# Altium PCB MACH_PCB.PcbDoc
Units mm, origin at the board's own origin, x right, y up, seen from the top; angles counter-clockwise.
Board outline 64 x 57 mm, 2 copper layers (Top Layer, Bottom Layer); 85 components, 38 nets, 264 pads, 24 vias.
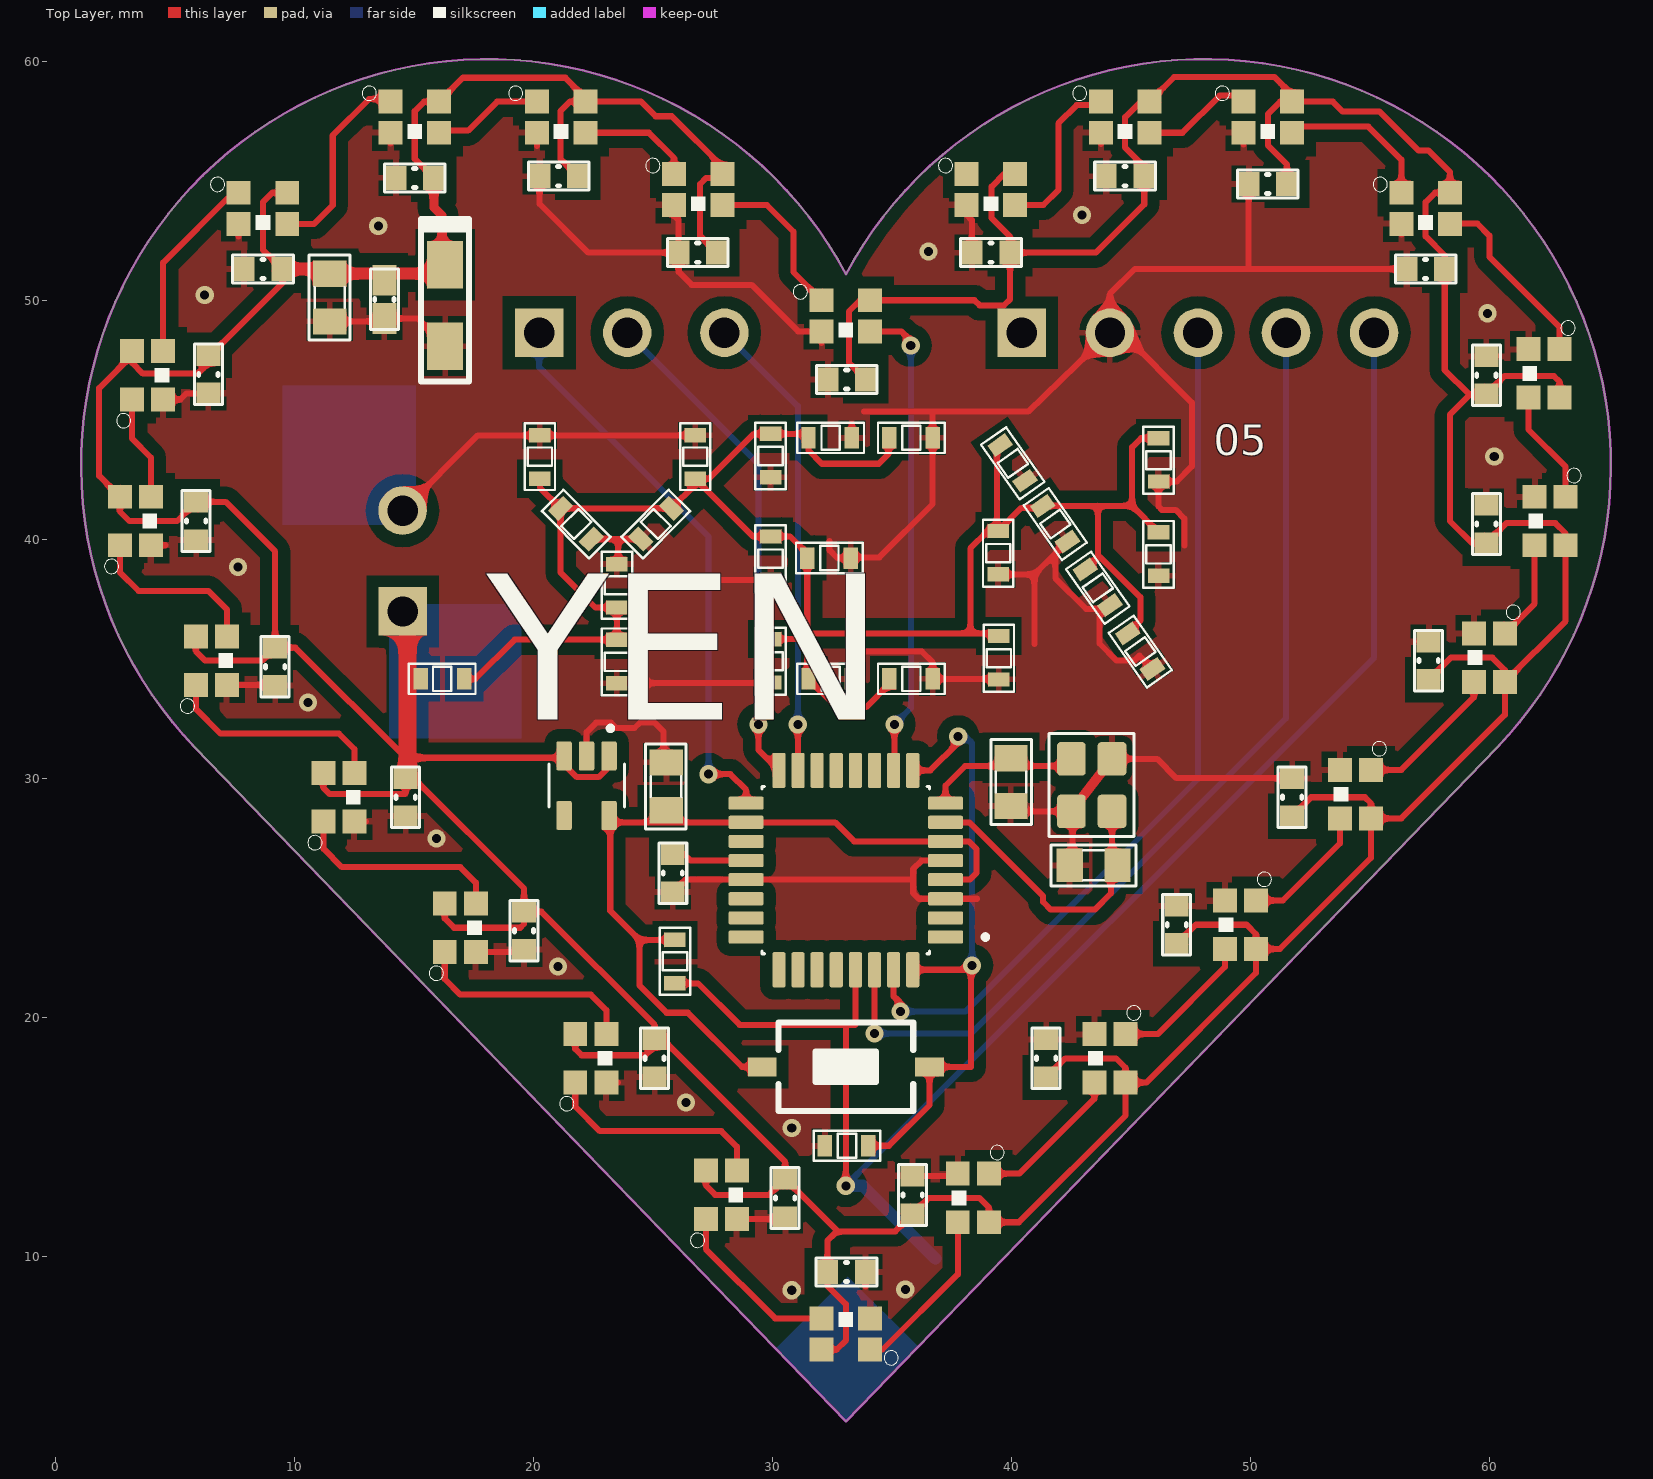
[diagram p0: Top Layer view]
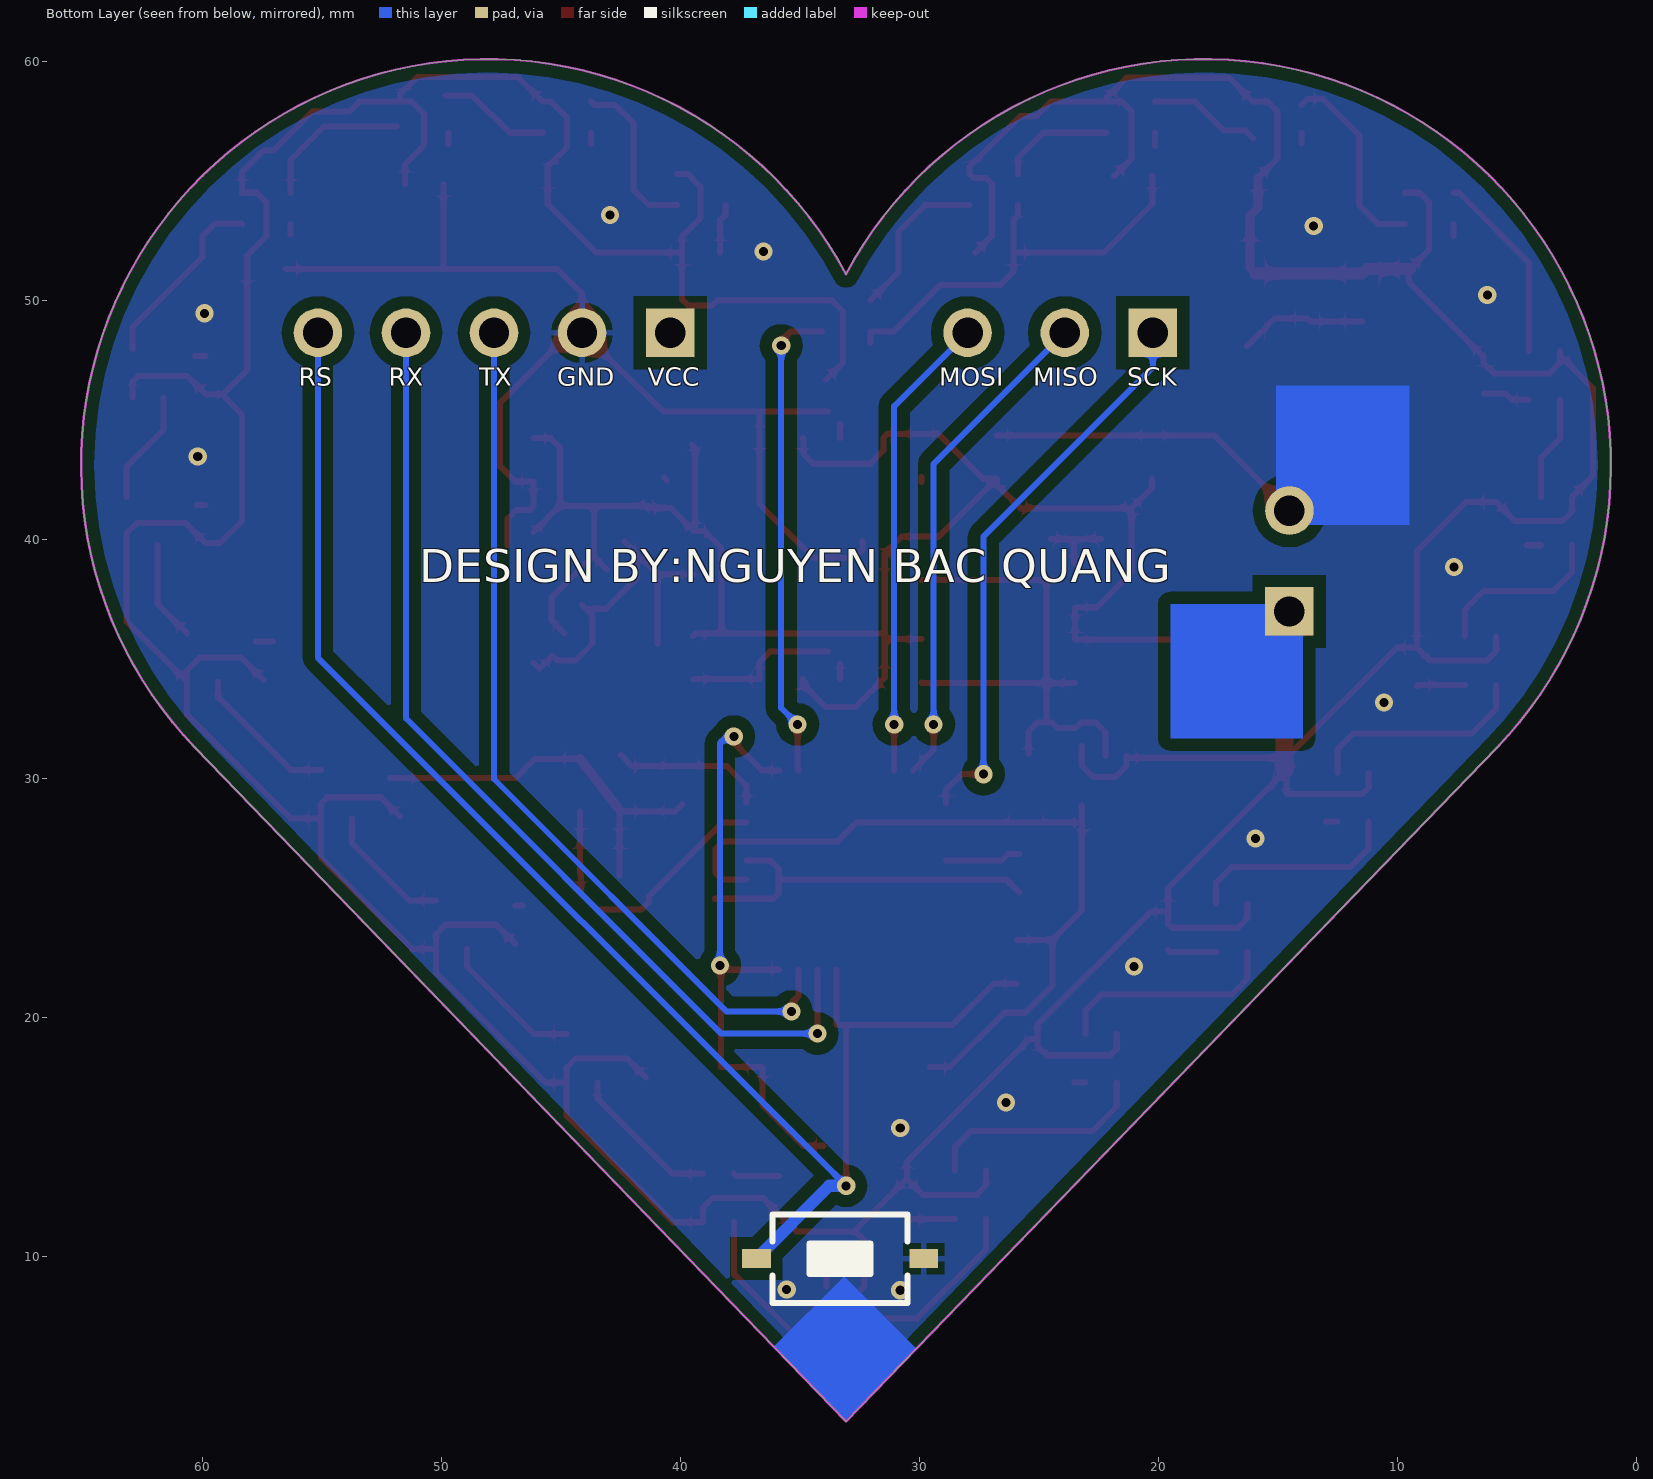
[diagram p1: Bottom Layer view, seen from below]
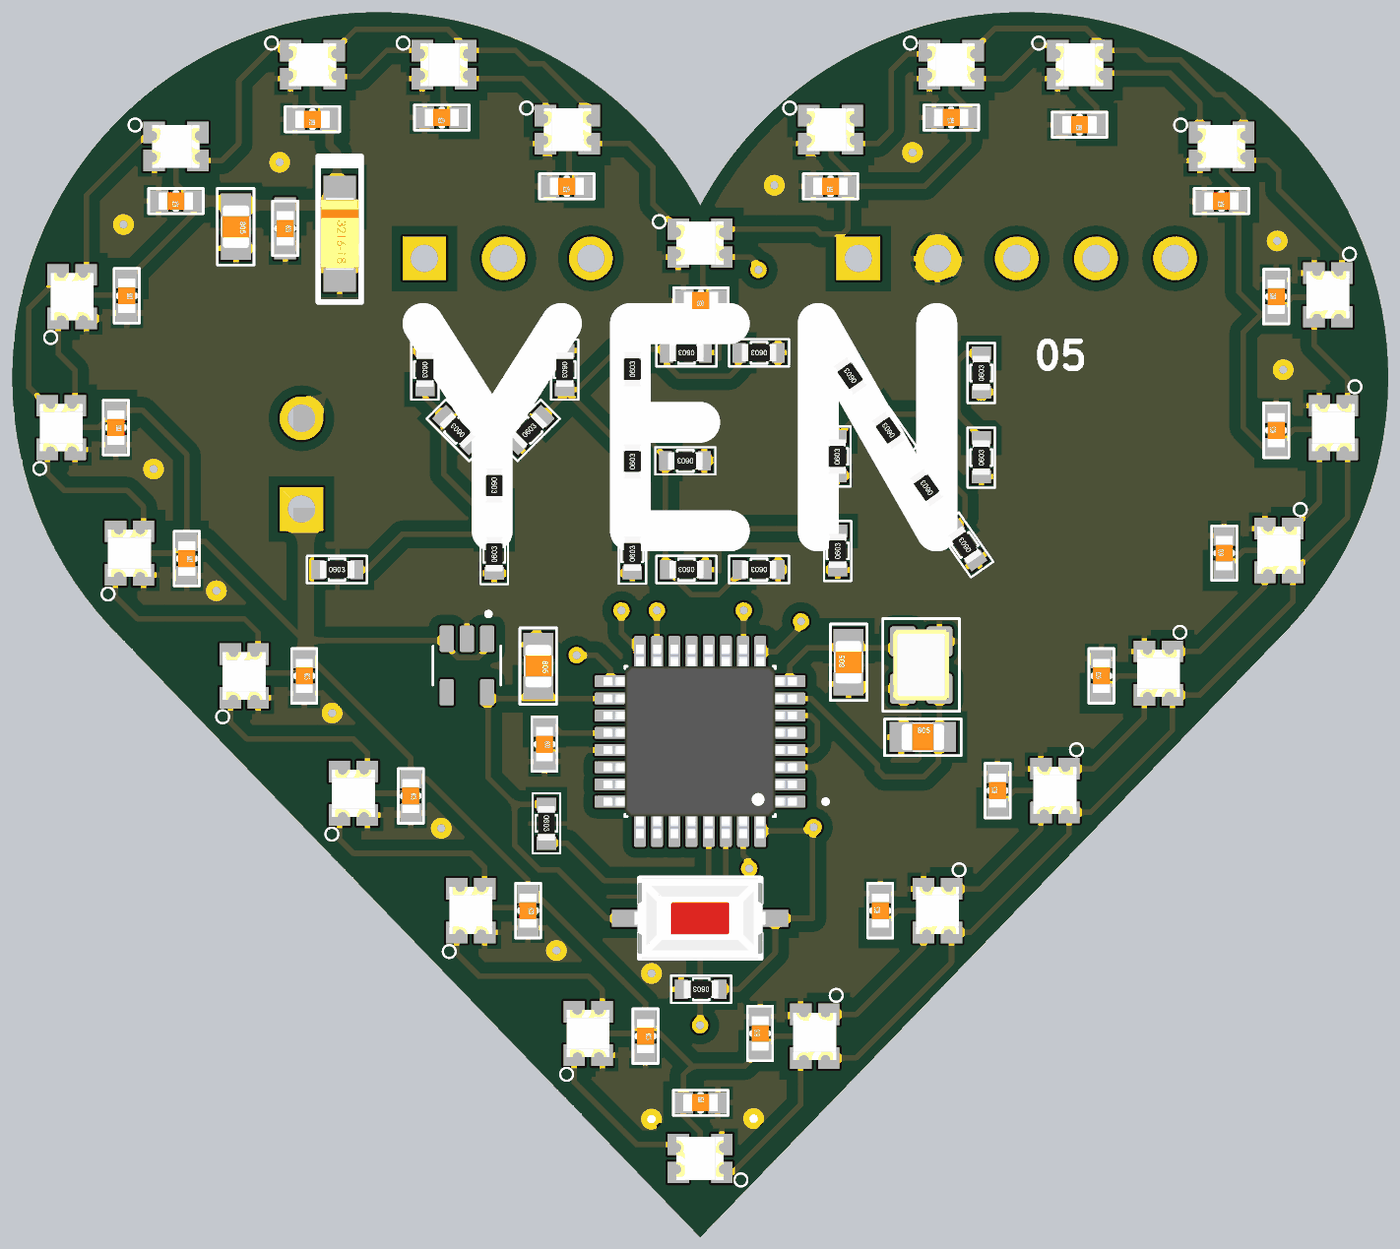
[diagram p2: 3D render of the assembled board from above, using the file's embedded part models]

## Layer stack, top to bottom
Top Solder: solder mask 0.0102, Solder Resist, Dk 3.5
Top Layer: signal copper 0.0356
Dielectric 1: dielectric 0.32, FR-4, Dk 4.8
Bottom Layer: signal copper 0.0356
Bottom Solder: solder mask 0.0102, Solder Resist, Dk 3.5

## Board outline
5.851,31.282 33.078,3.092 60.306,31.282 ccw(c48.078,43.092) 33.078,51.092 ccw(c18.078,43.092)

## Design rules (kind name [scope] priority, off if disabled: settings)
Clearance [All] p1: gap=0.508
PolygonConnect [All] p1: connectstyle=Relief reliefconductorwidth=0.254 reliefentries=4 polygonreliefangle="90 Angle" airgapwidth=0.254
RoutingVias [All] p1: holewidth=0.381 width=0.762 viastyle="Through Hole" minholewidth=0.381 minwidth=0.762 maxholewidth=0.381 maxwidth=0.762
SolderMaskExpansion [All] p1: expansion=0.102
Width [All] p1: maxlimit=0.254 minlimit=0.254 preferedwidth=0.254
30 further rules are at their usual default settings.

## Classes and differential pairs
component class "MACH NGUYEN LY": Cp1

## Components (designator, comment, footprint, x,y, rotation, side; value= is the part's Value field where it differs from the comment)
C1 "22pF" CN-SMD-0805 43.434,26.365 r0 top
C2 "22pF" CN-SMD-0805 39.98,29.845 r90 top
C3 "0.1uF" CN-SMD-0603#1 25.832,26.035 r270 top locked
C4 "1uF" CN-SMD-0805 25.552,29.667 r270 top
C5 "1uF" CN-SMD-0805 11.481,50.114 r270 top
C6 "0.1uF" CN-SMD-0603#2 13.767,50.038 r270 top locked
C7 "0.1uF" CN-SMD-0603#1 33.109,46.685 r180 top locked
C8 "0.1uF" CN-SMD-0603#1 26.873,51.994 r180 top locked
C9 "0.1uF" CN-SMD-0603#1 21.057,55.194 r180 top locked
C10 "0.1uF" CN-SMD-0603#1 15.037,55.118 r180 top locked
C11 "0.1uF" CN-SMD-0603#1 8.687,51.308 r180 top locked
C12 "0.1uF" CN-SMD-0603#1 6.401,46.901 r270 top locked
C13 "0.1uF" CN-SMD-0603#1 5.893,40.767 r270 top locked
C14 "0.1uF" CN-SMD-0603#1 9.195,34.671 r270 top locked
C15 "0.1uF" CN-SMD-0603#1 14.656,29.21 r270 top locked
C16 "0.1uF" CN-SMD-0603#1 19.609,23.622 r270 top locked
C17 "0.1uF" CN-SMD-0603#1 25.07,18.288 r270 top locked
C18 "0.1uF" CN-SMD-0603#1 30.531,12.446 r270 top locked
C19 "0.1uF" CN-SMD-0603#1 33.096,9.347 r0 top locked
C20 "0.1uF" CN-SMD-0603#1 35.865,12.573 r90 top locked
C21 "0.1uF" CN-SMD-0603#1 41.453,18.288 r90 top locked
C22 "0.1uF" CN-SMD-0603#1 46.914,23.876 r90 top locked
C23 "0.1uF" CN-SMD-0603#1 51.74,29.21 r90 top locked
C24 "0.1uF" CN-SMD-0603#1 57.455,34.925 r90 top locked
C25 "0.1uF" CN-SMD-0603#1 59.868,40.64 r90 top locked
C26 "0.1uF" CN-SMD-0603#1 59.868,46.863 r90 top locked
C27 "0.1uF" CN-SMD-0603#1 57.328,51.308 r180 top locked
C28 "0.1uF" CN-SMD-0603#1 50.724,54.864 r180 top locked
C29 "0.1uF" CN-SMD-0603#1 44.755,55.194 r180 top locked
C30 "0.1uF" CN-SMD-0603#1 39.141,51.994 r180 top locked
Cp1 "4.7uF" "tu tantalum smd3216" 16.307,49.784 r270 top locked
D1 "" RES-SMD-0603 20.269,43.459 r270 top
D2 "" RES-SMD-0603 21.793,40.64 r135 top
D3 "" RES-SMD-0603 26.772,43.459 r270 top
D4 "" RES-SMD-0603 25.121,40.64 r45 top
D5 "" RES-SMD-0603 23.495,38.075 r270 top
D6 "" RES-SMD-0603 23.495,34.874 r90 top
D7 "" RES-SMD-0603 29.921,43.485 r90 top
D8 "" RES-SMD-0603 29.921,39.192 r90 top
D9 "" RES-SMD-0603 29.921,34.9 r90 top
D10 "" RES-SMD-0603 32.436,44.247 r180 top
D11 "" RES-SMD-0603 35.814,44.247 r180 top
D12 "" RES-SMD-0603 32.385,39.218 r180 top
D13 "" RES-SMD-0603 32.436,34.163 r180 top
D14 "" RES-SMD-0603 35.814,34.163 r180 top
D15 "" RES-SMD-0603 39.472,35.027 r90 top
D16 "" RES-SMD-0603 39.446,39.421 r90 top
D17 "" RES-SMD-0603 40.056,43.18 r125 top
D18 "" RES-SMD-0603 41.834,40.64 r125 top
D19 "" RES-SMD-0603 43.612,37.973 r125 top
D20 "" RES-SMD-0603 45.39,35.306 r125 top
D21 "" RES-SMD-0603 46.152,39.37 r90 top
D22 "" RES-SMD-0603 46.152,43.307 r90 top
IC "ATMEGA328P-AU" QFP80P900X900X120-32N 33.071,26.162 r180 top locked
Led1 "" WS2812B-2020 33.071,49.352 r180 top locked
Led2 "" WS2812B-2020 26.899,54.635 r180 top locked
Led3 "" WS2812B-2020 21.158,57.658 r180 top locked
Led4 "" WS2812B-2020 15.037,57.658 r180 top locked
Led5 "" WS2812B-2020 8.687,53.848 r180 top locked
Led6 "" WS2812B-2020 3.861,46.863 r270 top locked
Led7 "" WS2812B-2020 3.353,40.767 r270 top locked
Led8 "" WS2812B-2020 6.528,34.925 r270 top locked
Led9 "" WS2812B-2020 11.862,29.21 r270 top locked
Led10 "" WS2812B-2020 16.942,23.749 r270 top locked
Led11 "" WS2812B-2020 22.403,18.288 r270 top locked
Led12 "" WS2812B-2020 27.864,12.573 r270 top locked
Led13 "" WS2812B-2020 33.071,6.756 r0 top locked
Led14 "" WS2812B-2020 38.405,12.446 r90 top locked
Led15 "" WS2812B-2020 44.12,18.288 r90 top locked
Led16 "" WS2812B-2020 49.581,23.876 r90 top locked
Led17 "" WS2812B-2020 54.392,29.338 r90 top locked
Led18 "" WS2812B-2020 59.995,35.052 r90 top locked
Led19 "" WS2812B-2020 62.535,40.767 r90 top locked
Led20 "" WS2812B-2020 62.281,46.94 r90 top locked
Led21 "" WS2812B-2020 57.328,53.848 r180 top locked
Led22 "" WS2812B-2020 50.724,57.658 r180 top locked
Led23 "" WS2812B-2020 44.755,57.658 r180 top locked
Led24 "" WS2812B-2020 39.141,54.635 r180 top locked
R1 "10k" RES-SMD-0603 25.922,22.352 r270 top locked
R2 "10k" RES-SMD-0603 33.122,14.63 r180 top locked
R3 "" RES-SMD-0603 16.18,34.163 r0 top
SW1 "" SW1-SMD 33.325,9.906 r0 bottom
SW2 "" SW1-SMD 33.071,17.932 r180 top locked
U1 "RT9013-33GB" SOT94P279X129-5N 22.225,29.693 r270 top locked
XT1 "16Mhz" "Thach Anh 4 chan 1" 43.358,29.718 r270 top locked

## Footprints (in the part's own frame and the unit in brackets; to place one, negate y for a bottom-side part, rotate by r counter-clockwise, add the part's x,y. Pads: shape width x height; smd on the part's side, far side on the other; paste and mask are expansions set on the pad)
CN-SMD-0603#1 [mm]
  rect 0.9x1 smd: 1(-0.8,0) 2(0.8,0)
  silkscreen extent -1.27,-0.58 1.27,0.58, body extent -0.8,-0.4 0.8,0.4, height 0.3
CN-SMD-0603#2 [mm]
  rect 1.281x1 smd: 1(-0.8,0) 2(0.8,0)
  silkscreen extent -1.27,-0.58 1.27,0.58, body extent -0.8,-0.4 0.8,0.4, height 0.3
CN-SMD-0805 [mm]
  rect 1.1x1.397 smd: 1(-1,0) 2(1,0)
  silkscreen extent -1.78,-0.86 1.78,0.84, body extent -1,-0.62 1,0.63, height 0.8
QFP80P900X900X120-32N [mm]
  rrect25% 1.47x0.55 smd: 1(-4.17,2.8) 2(-4.17,2) 3(-4.17,1.2) 4(-4.17,0.4) 5(-4.17,-0.4) 6(-4.17,-1.2) 7(-4.17,-2) 8(-4.17,-2.8) 17(4.17,-2.8) 18(4.17,-2) 19(4.17,-1.2) 20(4.17,-0.4) 21(4.17,0.4) 22(4.17,1.2) 23(4.17,2) 24(4.17,2.8)
  rrect25% 0.55x1.47 smd: 9(-2.8,-4.17) 10(-2,-4.17) 11(-1.2,-4.17) 12(-0.4,-4.17) 13(0.4,-4.17) 14(1.2,-4.17) 15(2,-4.17) 16(2.8,-4.17) 25(2.8,4.17) 26(2,4.17) 27(1.2,4.17) 28(0.4,4.17) 29(-0.4,4.17) 30(-1.2,4.17) 31(-2,4.17) 32(-2.8,4.17)
  silkscreen extent -5.94,-3.5 3.5,3.5, body extent -4.5,-4.5 4.5,4.5, height 1.2
RES-SMD-0603 [mm]
  rect 0.6x0.9 smd: 1(-0.889,0) 2(0.927,0)
  silkscreen extent -1.4,-0.64 1.4,0.64, body extent -0.8,-0.4 0.8,0.4, height 0.43
SOT94P279X129-5N [mm]
  rrect25% 1.22x0.65 smd: 1(-1.245,0.94) 2(-1.245,0) 3(-1.245,-0.94) 4(1.245,-0.94) 5(1.245,0.94)
  silkscreen extent -2.5,-1.58 0.9,1.58
SW1-SMD [mm]
  rect 1.2x0.8 smd: 1(-3.5,0) 2(3.5,0)
  silkscreen extent -2.82,-1.85 2.82,1.85, body extent -3.05,-1.85 3.05,1.85, height 2.5
"Thach Anh 4 chan 1" [mm] "SMD Crystal 4-lead leadless package"
  round 0.508 on Mech15: 0(0,0)
  rrect25% 1.4x1.2 smd: 1(-1.1,-0.85) 2(1.1,-0.85) 3(1.1,0.85) 4(-1.1,0.85)
  Top Layer lines w0.4: 1.1,-0.85 0.876,-0.677 -0.233,0.18 -1.1,0.85
  silkscreen extent -2.16,-1.78 2.16,1.78, body extent -1.65,-1.3 1.65,1.3, height 0.8
"tu tantalum smd3216" [mm]
  rect 1.992x1.5 smd: 1(-1.7,0) 2(1.7,0)
  silkscreen extent -3.61,-1 3.18,1, body extent -1.7,-0.9 1.7,0.9, height 1.69
WS2812B-2020 [mm]
  rect 1x1 smd: 1(1.015,-0.65) 2(1.015,0.65) 3(-1.015,0.65) 4(-1.015,-0.65)
  silkscreen extent -0.3,-1.3 2.2,0.9, body extent -1.1,-1 1.1,1, height 0.84

## Part data
C1 C2 C3 C4 C5 C6 C7 C8 C9 C10 C11 C12 C13 C14 C15 C16 C17 C18 C19 C20 C21 C22 C23 C24 C25 C26 C27 C28 C29 C30: library part CN
Cp1: library part "Tu tantalum 4.7uF 16V SMD3216", "Dán"
D1 D2 D3 D4 D5 D6 D7 D8 D9 D10 D11 D12 D13 D14 D15 D16 D17 D18 D19 D20 D21 D22 R1 R2 R3: library part Res-SMD, "Resistor"
IC: "AVR AVR® ATmega Microcontroller IC 8-Bit 20MHz 32KB (16K x 16) FLASH 32-TQFP (7x7)"
Led1 Led2 Led3 Led4 Led5 Led6 Led7 Led8 Led9 Led10 Led11 Led12 Led13 Led14 Led15 Led16 Led17 Led18 Led19 Led20 Led21 Led22 Led23 Led24: library part WS2812B-2020, "Programmable LED; SMD; 2020; RGB; 2x2x0.84mm; 3.7÷5.3V; 2kHz"
SW1 SW2: library part SW2, "Switch button 2 pin"
U1: "Linear Voltage Regulator IC 1 Output 500mA SOT-23-5"
XT1: library part "Thach Anh 4 Chan SMD", "Crystal For all Crystal 2pin."

## Free pads (board coordinates)
  rect 2.032x2.032 hole 1.27: 4(14.529,36.982) 5(20.244,48.641) 8(40.437,48.641)
  round 2.032 hole 1.27: 6(23.927,48.641) 7(27.991,48.641) 10(47.803,48.641) 11(51.486,48.641) 12(55.169,48.641) 13(14.529,41.199) 17(44.12,48.641)

## Via types
v1: diameter 0.762, hole 0.381, Top Layer to Bottom Layer, 24 vias

## Nets (pads, with @x,y where several pads share a name; then routed paths per layer and width w, separated by ;. In a path a pad name is that pad's centre, name@x,y a point inside that pad or via, vN(x,y) a via of type N, cw(c..) or ccw(c..) an arc to the next point about the centre after c; other vN are vias at no path point)
BUT: IC.9 IC.32 R2.1 SW2.1 | length 25.7
  Top Layer w0.254: R2.1 34.874,14.63 36.571,16.327 SW2.1 38.303,17.932 38.303,21.992 IC.32 ; IC.9 36.606,30.332 37.77,31.496 v1(37.77,31.75)
  Bottom Layer w0.254: v1(37.77,31.75) 38.075,31.75 38.354,31.471 v1(38.354,22.174)
GND: C1.1 C2.1 C3.2 C4.1 C5.2 C6.2 C7.2 C8.2 C9.2 C10.2 C11.2 C12.2 C13.2 C14.2 C15.2 C16.2 C17.2 C18.2 C19.2 C20.2 C21.2 C22.2 C23.2 C24.2 C25.2 C26.2 C27.2 C28.2 C29.2 C30.2 Cp1.2 D1.1 D2.1 D3.1 D4.1 D5.1 D6.1 D7.1 D8.1 D9.1 D10.1 D11.1 D12.1 D13.1 D14.1 D15.1 D16.1 D17.1 D18.1 D19.1 D20.1 D21.1 D22.1 IC.3 IC.5 IC.21 Led1.2 Led2.2 Led3.2 Led4.2 Led5.2 Led6.2 Led7.2 Led8.2 Led9.2 Led10.2 Led11.2 Led12.2 Led13.2 Led14.2 Led15.2 Led16.2 Led17.2 Led18.2 Led19.2 Led20.2 Led21.2 Led22.2 Led23.2 Led24.2 pad.17 R2.2 SW1.1 U1.2 XT1.2 XT1.4 | length 187.8
  Top Layer w0.254: Led7.2 4.598,39.752 ; Led6.2 5.233,45.848 5.486,46.101 C12.2 ; Led8.2 9.156,33.91 C14.2 ; 7.672,52.679 Led5.2 ; C5.2 13.643,49.114 C6.2 15.153,49.238 Cp1.2 ; Led9.2 Led9.2@13.006,28.195 ; Led4.2@14.022,56.565 Led4.2 ; 14.529,41.199 17.678,44.348 D1.1 D3.1 ; Led10.2 19.521,22.734 C16.2 ; 20.143,56.463 Led3.2 ; C9.2@20.269,55.207 C9.2 20.257,54.038 22.301,51.994 C8.2 ; U1.2 22.225,31.928 22.631,32.334 23.241,32.334 23.47,32.106 24.232,32.106 24.46,32.334 24.689,32.334 ; D2.1 23.546,40.011 ; Led11.2 Led11.2@23.547,17.273 ; D6.1 24.689,33.985 ; D5.1 23.546,39.014 23.546,40.011 ; 24.155,38.303 24.689,38.303 ; D4.1 23.546,40.011 ; C4.1@25.451,31.026 25.451,31.953 25.07,32.334 24.689,32.334 ; C3.2 26.359,25.762 IC.21 35.82,25.762 35.89,25.832 ; Led2.2 25.884,53.568 26.073,53.378 C8.2 ; Led12.2 30.443,11.558 C18.2 ; D9.1 29.896,33.985 24.689,33.985 ; D8.1 24.689,38.303 ; D7.1@29.921,42.403 D7.1 ; Led1.2@32.056,48.208 Led1.2 31.079,48.702 29.134,50.648 26.619,50.648 26.073,51.194 C8.2 ; 32.393,39.931 32.393,39.54 32.715,39.218 D12.1 ; D12.1@33.274,39.243 34.468,39.243 36.703,41.478 D11.1 36.703,45.288 36.754,45.339 ; D13.1 33.325,34.798 ; D10.1 33.325,44.831 ; 33.833,35.306 36.246,35.306 36.703,34.849 D14.1 39.446,34.163 D15.1 ; 33.833,45.339 36.754,45.339 ; 33.896,8.75 C19.2 ; C20.2 37.667,13.373 Led14.2 ; IC.5 36.239,26.562 35.89,26.213 35.89,25.832 ; Led24.2 38.126,53.568 38.341,53.353 C30.2 ; 38.563,24.962 IC.3 36.125,24.962 35.89,25.197 35.89,25.832 ; D16.1 40.964,38.532 ; C2.1@39.929,28.918 40.229,28.618 XT1.2 ; D17.1 D17.1@40.7,42.586 ; 40.964,35.63 40.964,38.532 ; D18.1 41.834,39.402 ; C1.1@42.558,25.945 42.558,28.568 XT1.2 ; XT1.2@42.681,28.842 42.508,28.669 XT1.2 ; Led23.2@43.74,56.539 Led23.2 ; D19.1 D19.1@43.961,37.084 ; XT1.4 46.093,30.818 46.901,30.01 C23.2 C23.2@52.159,30.01 ; D20.1@46.152,34.83 D20.1 45.348,35.129 45.146,34.926 44.399,34.926 43.682,35.642 43.682,36.805 D19.1@43.961,37.084 ; D21.1 D21.1@46.152,38.649 ; C22.2@46.596,24.676 C22.2 ; 47.237,39.734 47.237,40.86 46.865,41.232 46.294,41.232 46.152,41.374 D22.1 46.914,42.418 47.549,43.053 47.549,45.72 44.628,48.641 pad.17 ; Led22.2@49.709,56.514 Led22.2 ; C28.2 49.924,51.346 49.886,51.308 ; Led21.2@56.313,52.755 Led21.2 ; C27.2 49.886,51.308 ; C24.2@57.061,35.725 C24.2 C24.2@57.772,35.725 ; C25.2 C25.2@60.236,41.44 ; C26.2 C26.2@60.312,47.663 ; 24.689,32.334 24.689,33.985 ; 24.689,33.985 24.689,38.303 ; 36.754,45.339 40.7,45.339 pad.17 ; 40.964,38.532 41.834,39.402 ; 41.834,39.402 41.834,38.38 43.13,37.084 D19.1@43.961,37.084 ; pad.17 44.12,50.267 45.161,51.308 49.886,51.308
  other v1: 30.81,8.585 35.56,8.611 30.81,15.367 26.391,16.434 21.031,22.123 15.951,27.483 10.566,33.172 7.645,38.837 60.198,43.459 59.919,49.454 6.248,50.216 36.525,52.045 13.513,53.111 42.951,53.569
MISO: IC.16 pad.6 | length 20.9
  Top Layer w0.254: v1(29.413,32.258) 29.413,31.19 IC.16
  Bottom Layer w0.254: pad.6 29.413,43.155 v1(29.413,32.258)
MOSI: IC.15 pad.7 | length 19.6
  Top Layer w0.254: v1(31.064,32.258) 31.064,30.339 IC.15
  Bottom Layer w0.254: pad.7 31.064,45.568 v1(31.064,32.258)
NetC1_2: C1.2 IC.7 XT1.3 | length 12.3
  Top Layer w0.254: IC.7 38.234,28.162 41.326,25.07 41.326,24.828 41.643,24.511 43.485,24.511 44.158,25.184 44.158,25.945 44.208,25.995 XT1.3
NetC2_2: C2.2 IC.8 XT1.1 | length 6.5
  Top Layer w0.254: IC.8 37.241,29.697 38.062,30.518 42.043,30.518 XT1.1@42.508,30.982
NetC3_1: C3.1 IC.20 | length 3.2
  Top Layer w0.254: C3.1 26.302,26.835 26.575,26.562 IC.20
NetD1_2: D1.2 D2.2 D3.2 D4.2 D5.2 D6.2 D7.2 D8.2 D9.2 D10.2 D11.2 D12.2 D13.2 D14.2 D15.2 D16.2 D17.2 D18.2 D19.2 D20.2 D21.2 D22.2 R3.2 | length 85
  Top Layer w0.254: R3.2 17.577,34.163 19.215,35.801 D6.2 D5.2 22.593,37.148 21.138,38.603 D2.2 ; D1.2 20.269,42.164 D2.2 ; D9.2 31.458,35.826 ; D14.2 34.887,33.947 33.922,32.982 32.69,32.982 D13.2 31.458,34.214 31.458,35.826 ; D11.2 34.849,44.208 34.849,43.561 34.45,43.162 32.073,43.162 31.509,43.726 D10.2 31.344,44.412 D7.2 29.223,44.412 27.343,42.533 D3.2 ; D15.2 39.357,36.068 38.278,36.068 ; D17.2 39.39,43.805 39.39,40.404 D16.2 ; D19.2 43.612,39.264 ; D20.2 45.39,36.597 45.39,37.575 43.701,39.264 43.612,39.264 ; D21.2 45.049,41.399 ; D22.2 45.428,44.234 45.049,43.856 45.049,41.399 ; D2.2 D4.2 26.772,42.291 D3.2 ; D3.2 29.185,40.119 D8.2 30.736,40.119 31.458,39.397 D12.2 31.458,36.068 ; 31.458,35.826 31.458,36.068 ; 31.458,36.068 38.278,36.068 ; 38.278,36.068 38.278,39.624 39.001,40.348 D16.2 ; D16.2 40.411,41.313 41.302,41.313 D18.2 43.612,41.399 ; 43.612,39.264 43.612,41.399 ; 43.612,41.399 45.049,41.399
NetLed1_1: Led1.1 Led2.3 | length 6.8
  Top Layer w0.254: Led2.3 29.768,53.985 30.882,52.871 30.882,51.176 Led1.1
NetLed2_1: Led2.1 Led3.3 | length 4.8
  Top Layer w0.254: Led3.3 24.831,57.008 25.884,55.955 Led2.1
NetLed3_1: Led3.1 Led4.3 | length 4.7
  Top Layer w0.254: Led4.3@16.037,56.769 16.362,57.095 17.267,57.095 18.481,58.308 Led3.1
NetLed4_1: Led4.1 Led5.3 | length 8.3
  Top Layer w0.254: Led5.3 10.831,53.198 11.608,53.975 11.608,56.895 13.133,58.42 13.783,58.42 Led4.1@14.022,58.181
NetLed5_1: Led5.1 Led6.3 | length 8.1
  Top Layer w0.254: Led6.3 4.511,51.576 7.433,54.498 Led5.1
NetLed6_1: Led6.1 Led7.3 | length 4.4
  Top Layer w0.254: Led6.1 3.211,44.211 4.003,43.419 Led7.3
NetLed7_1: Led7.1 Led8.3 | length 7.4
  Top Layer w0.254: Led7.1 2.703,38.623 3.48,37.846 6.401,37.846 7.178,37.069 Led8.3
NetLed9_1: Led9.1 Led10.3 | length 9
  Top Layer w0.254: Led9.1 11.227,28.18 11.227,27.051 11.989,26.289 16.942,26.289 17.592,25.639 Led10.3
NetLed10_1: Led10.1 Led11.3 | length 9.4
  Top Layer w0.254: Led10.1 16.292,21.605 16.942,20.955 22.403,20.955 23.053,20.305 Led11.3
NetLed11_1: Led11.1 Led12.3 | length 9.5
  Top Layer w0.254: Led11.1 21.753,16.271 22.784,15.24 27.864,15.24 28.514,14.59 Led12.3
NetLed12_1: Led12.1 Led13.3 | length 7.3
  Top Layer w0.254: Led12.1 27.214,10.302 30.109,7.406 Led13.3
NetLed13_1: Led13.1 Led14.3 | length 7.1
  Top Layer w0.254: Led13.1 34.605,6.106 37.755,9.256 Led14.3
NetLed14_1: Led14.1 Led15.3 | length 6.4
  Top Layer w0.254: Led14.1 40.334,13.461 43.47,16.597 Led15.3
NetLed15_1: Led15.1 Led16.3 | length 6.1
  Top Layer w0.254: Led15.1 46.125,19.303 48.931,22.108 Led16.3
NetLed17_1: Led17.1 Led18.3 | length 6.2
  Top Layer w0.254: Led17.1 56.312,30.353 59.345,33.386 Led18.3
NetLed18_1: Led18.1 Led19.3 | length 4.2
  Top Layer w0.254: Led18.1 61.885,37.307 Led19.3
NetLed19_1: Led19.1 Led20.3 | length 4.8
  Top Layer w0.254: Led20.3 61.631,44.592 63.185,43.038 Led19.1
NetLed20_1: Led20.1 Led21.3 | length 7.8
  Top Layer w0.254: Led21.3 58.358,53.213 59.487,53.213 59.995,52.705 59.995,51.816 62.931,48.88 Led20.1
NetLed21_1: Led21.1 Led22.3 | length 6.4
  Top Layer w0.254: Led22.3@51.866,57.262 54.93,57.262 56.313,55.879 Led21.1
NetLed22_1: Led22.1 Led23.3 | length 4.7
  Top Layer w0.254: Led23.3 47.153,57.008 48.707,58.562 Led22.1@49.836,58.562
NetLed23_1: Led23.1 Led24.3 | length 7
  Top Layer w0.254: Led24.3 41.336,53.985 41.961,54.61 41.961,57.404 42.723,58.166 43.598,58.166 Led23.1
RESET: IC.29 pad.12 R1.2 SW1.2 | length 66.8
  Top Layer w0.254: R1.2 26.886,21.425 28.626,19.685 33.071,19.685 ; 33.071,13.335 33.071,19.685 ; IC.29 33.471,19.704 33.452,19.685 33.071,19.685
  Bottom Layer w0.254: v1(33.071,12.954) 55.169,35.052 pad.12
  Bottom Layer w0.508: v1(33.071,12.954) 33.777,12.954 SW1.2
RX: IC.30 pad.11 | length 41.5
  Top Layer w0.254: v1(34.271,19.323) IC.30
  Bottom Layer w0.254: v1(34.271,19.323) 38.297,19.323 51.486,32.512 pad.11
SCK: IC.17 pad.5 | length 23.8
  Top Layer w0.254: v1(27.33,30.175) 28.245,30.175 28.901,29.519 IC.17
  Bottom Layer w0.254: pad.5 20.244,47.193 27.33,40.107 v1(27.33,30.175)
TX: IC.31 pad.10 | length 37
  Top Layer w0.254: IC.31 35.071,20.885 35.382,20.574 35.357,20.549 v1(35.357,20.244)
  Bottom Layer w0.254: v1(35.357,20.244) 38.075,20.244 47.803,29.972 pad.10
VCC: C4.2 IC.4 IC.6 IC.18 R1.1 SW2.2 U1.5 | length 34.3
  Top Layer w0.254: U1.5@23.216,28.854 U1.5@23.216,28.194 ; R1.1 24.435,23.241 ; SW2.2 28.727,17.932 26.467,20.193 25.578,20.193 24.435,21.336 24.435,23.241 ; IC.4 38.259,25.762 38.532,26.035 38.532,27.051 38.221,27.362 IC.6 33.42,27.362 32.62,28.162 IC.18 23.248,28.162 U1.5@23.216,28.194 ; U1.5@23.216,28.194 23.216,24.46 24.435,23.241
VIN: C5.1 C6.1 C7.1 C8.1 C9.1 C10.1 C11.1 C12.1 C13.1 C14.1 C15.1 C16.1 C17.1 C18.1 C19.1 C20.1 C21.1 C22.1 C23.1 C24.1 C25.1 C26.1 C27.1 C28.1 C29.1 C30.1 Cp1.1 Led1.4 Led2.4 Led3.4 Led4.4 Led5.4 Led6.4 Led7.4 Led8.4 Led9.4 Led10.4 Led11.4 Led12.4 Led13.4 Led14.4 Led15.4 Led16.4 Led17.4 Led18.4 Led19.4 Led20.4 Led21.4 Led22.4 Led23.4 Led24.4 pad.4 pad.8 R3.1 U1.1 U1.3 | length 292.7
  Top Layer w0.254: Led6.4 Led6.4@3.211,47.701 ; Led8.4 5.878,35.321 6.274,34.925 8.649,34.925 C14.1 ; Led5.4 9.083,54.498 8.687,54.102 8.687,52.108 C11.1 9.614,51.181 9.487,50.711 6.477,47.701 C12.1 6.401,47.371 5.962,46.932 3.665,46.932 3.211,47.386 Led6.4@3.211,47.701 ; Led9.4 11.212,29.606 11.474,29.344 14.632,29.344 14.656,29.368 C15.1 14.999,30.01 19.609,25.4 C16.1 ; C5.1@11.287,51.308 C5.1 ; 14.732,33.782 14.757,33.757 ; C10.1 15.037,55.918 15.037,57.912 15.433,58.308 Led4.4 17.053,59.309 21.338,59.309 22.173,58.474 Led3.4 ; Cp1.1@15.937,51.114 Cp1.1@16.18,51.357 ; Led10.4 16.292,24.145 16.688,23.749 19.451,23.749 19.609,23.907 C16.1 ; Led11.4 21.753,18.684 22.022,18.415 24.689,18.415 25.07,18.796 C17.1 ; C9.1 21.133,55.918 21.133,57.912 21.529,58.308 Led3.4 ; U1.1@23.216,31.344 23.216,30.531 22.733,30.048 21.819,30.048 21.336,30.531 21.336,30.938 21.259,30.861 14.732,30.861 14.656,30.861 10.046,35.471 C14.1 ; Led12.4 27.214,12.969 27.61,12.573 29.858,12.573 C18.1 ; C8.1 26.975,52.692 26.975,54.864 27.229,55.118 27.746,55.118 Led2.4 27.914,55.576 25.79,57.7 25.112,57.7 24.504,58.308 Led3.4 ; Led13.4 32.7,6.106 33.071,6.477 33.071,8.001 32.296,8.776 C19.1 32.296,10.655 32.69,11.049 ; C7.1 33.198,47.396 33.198,49.53 33.67,50.002 Led1.4 38.451,50.002 38.669,49.784 39.687,49.784 39.941,50.038 C30.1 ; Led24.4 39.694,55.285 39.167,54.758 39.167,53.436 39.941,52.662 C30.1 ; C21.1 42.253,18.288 44.374,18.288 44.77,17.892 Led15.4 ; C22.1 47.714,23.876 49.835,23.876 50.231,23.48 Led16.4 ; C28.1 51.524,55.684 50.724,56.484 50.724,57.785 51.232,58.293 51.232,58.308 Led22.4 ; C23.1 52.54,29.21 54.788,29.21 55.042,28.956 Led17.4 ; C24.1 58.382,35.052 60.122,35.052 60.645,34.529 Led18.4 ; Led20.4 62.931,46.594 62.693,46.832 60.637,46.832 C26.1 59.195,46.063 ; Led6.4@3.211,47.701 1.833,46.324 1.833,42.652 Led7.4 2.703,41.163 3.099,40.767 5.093,40.767 C13.1 7.125,41.567 9.195,39.497 C14.1 ; C16.1 20.333,24.422 25.07,19.685 C17.1 ; C17.1 25.413,19.088 30.531,13.97 C18.1 ; C18.1 32.69,11.087 32.69,11.049 ; 32.69,11.049 35.141,11.049 C20.1 36.538,12.446 38.659,12.446 39.055,12.05 Led14.4 40.311,11.431 44.77,15.89 Led15.4 ; C30.1 43.536,51.994 45.555,54.013 C29.1 45.555,55.588 44.755,56.388 44.755,57.658 45.405,58.308 Led23.4 46.799,59.338 51.013,59.338 51.739,58.611 Led22.4 ; Led15.4 45.645,17.273 50.231,21.859 Led16.4 ; Led16.4 51.233,22.861 55.042,26.67 Led17.4 ; Led22.4 53.442,58.308 53.858,57.892 55.403,57.892 57.033,56.261 57.455,56.261 58.343,55.373 Led21.4 57.724,54.498 57.328,54.102 57.328,52.674 58.128,51.874 C27.1 58.128,47.079 59.144,46.063 59.195,46.063 ; Led17.4 56.314,28.323 60.645,32.654 Led18.4 ; 59.195,46.063 58.344,45.212 58.344,40.767 59.271,39.84 C25.1 60.704,40.677 62.752,40.677 63.185,40.244 Led19.4 63.185,36.577 Led18.4
  Top Layer w0.381: C10.1 15.837,53.886 16.18,53.543 Cp1.1@16.18,51.357
  Top Layer w0.508: C11.1 C5.1@11.287,51.308 ; C5.1 Cp1.1@15.937,51.114
  Top Layer w0.762: pad.4 14.732,36.779 14.732,33.782 14.732,30.861 C15.1@14.732,30.328
WS2812B: IC.10 Led1.3 | length 20.2
  Top Layer w0.254: Led1.3 35.397,48.702 35.738,48.362 35.789,48.362 v1(35.789,48.108) ; IC.10 35.103,30.364 v1(35.103,32.258)
  Bottom Layer w0.254: v1(35.103,32.258) 35.789,32.944 v1(35.789,48.108)
WS-1: Led8.1 Led9.3 | length 9.3
  Top Layer w0.254: Led8.1 5.878,32.908 6.909,31.877 11.862,31.877 12.512,31.227 Led9.3
WS-2: Led16.1 Led17.3 | length 5.5
  Top Layer w0.254: Led16.1 51.358,24.891 53.742,27.275 Led17.3
pads on no net: IC.1 IC.2 IC.11 IC.12 IC.13 IC.14 IC.19 IC.22 IC.23 IC.24 IC.25 IC.26 IC.27 IC.28 Led24.1 U1.4 XT1.0

## Polygon pours and split planes (outlines as drawn)
GND on Bottom Layer "Bottom Layer-GND" (solid, remove dead copper, pour order 0): 15.508,59.897 20.649,59.897 25.763,58.256 29.889,55.32 33.078,51.092 35.469,54.494 38.834,57.359 42.985,59.311 47.85,60.091 51.897,59.658 55.763,58.256 59.293,55.869 62.296,52.412 64.55,47.297 65.032,41.835 63.938,36.97 61.567,32.745 33.078,3.092 5.851,31.282 2.914,35.408 1.305,40.324 1.214,45.238 2.574,50.065 4.694,53.574 7.596,56.476 11.342,58.701
GND on Top Layer "TOP Layer-GND" (solid, remove dead copper, pour order 6): 17.882,60.091 22.37,59.542 26.706,57.74 30.21,55.002 33.078,51.092 35.947,55.002 40.078,58.092 45.036,59.818 49.735,60.011 54.226,59.358 58.243,56.718 61.138,53.823 63.634,49.949 64.997,44.749 64.997,41.832 64.524,38.788 63.468,35.87 61.963,33.283 58.672,29.591 33.078,3.092 5.851,31.282 3.078,35.092 1.249,40.691 1.249,45.493 3.078,51.092 5.393,54.41 8.734,57.294 13.136,59.358

## Keep-outs
Keep-Out Layer:
  the board outline again, w0.1

## Other copper
Bottom Layer:
  rectangle net GND: 9.5,40.589 15.088,46.431
  region net GND: 33.092,3.153 36.127,6.206 33.147,9.169 30.111,6.117
  rectangle net VIN: 13.97,31.674 19.507,37.287

## Silkscreen, mask and mechanical layers (free items; w line width, h text height)
Top Overlay:
  text "05" at 48.463,43.51 h1.27
  text "YEN" at 18.059,32.461 h9.65
Bottom Overlay:
  text "SCK" at 21.311,46.431 h0.76
  text "MISO" at 25.248,46.431 h0.76
  text "MOSI" at 29.185,46.431 h0.76
  text "VCC" at 41.377,46.431 h0.76
  text "GND" at 45.155,46.431 h0.76
  text "TX" at 48.425,46.431 h0.76
  text "RX" at 52.203,46.431 h0.76
  text "RS" at 55.982,46.431 h0.76
  text "DESIGN BY:NGUYEN BAC QUANG" at 50.927,38.202 h1.4
Bottom Paste:
  region: 30.185,6.042 33.072,3.143 36.008,6.068 33.122,8.966
  rectangle: 14.148,31.877 19.126,37.033
  rectangle: 14.148,39.98 19.279,45.288
Bottom Solder:
  region: 30.21,6.099 33.096,3.2 36.033,6.125 33.146,9.023
  rectangle: 14.021,31.725 18.999,36.881
  rectangle: 13.818,39.954 18.948,45.263